# EAGLE board Load Bank Mosfet Control Board rev2 (EAGLE 8.4.1)
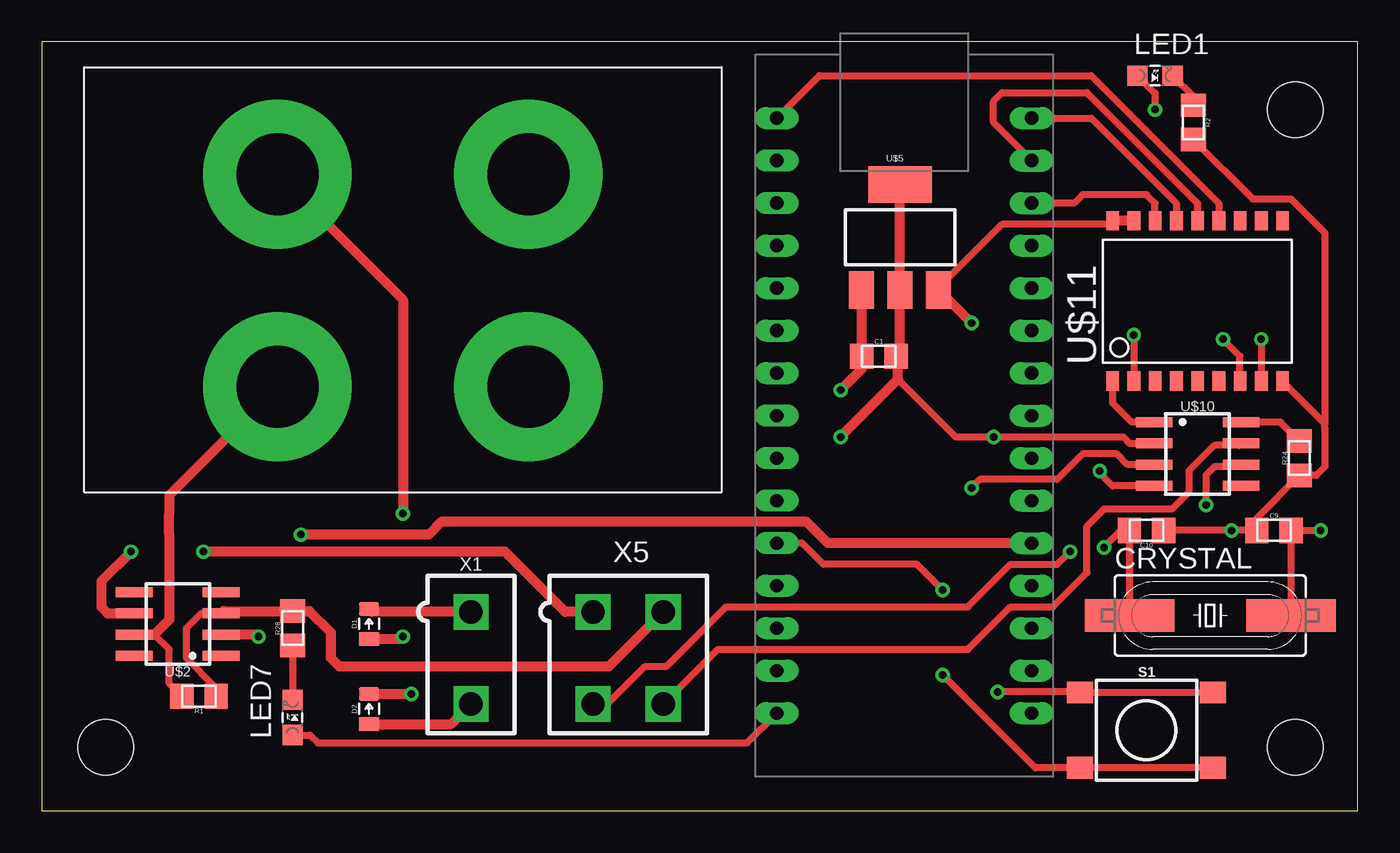
[diagram p0: board, top side]
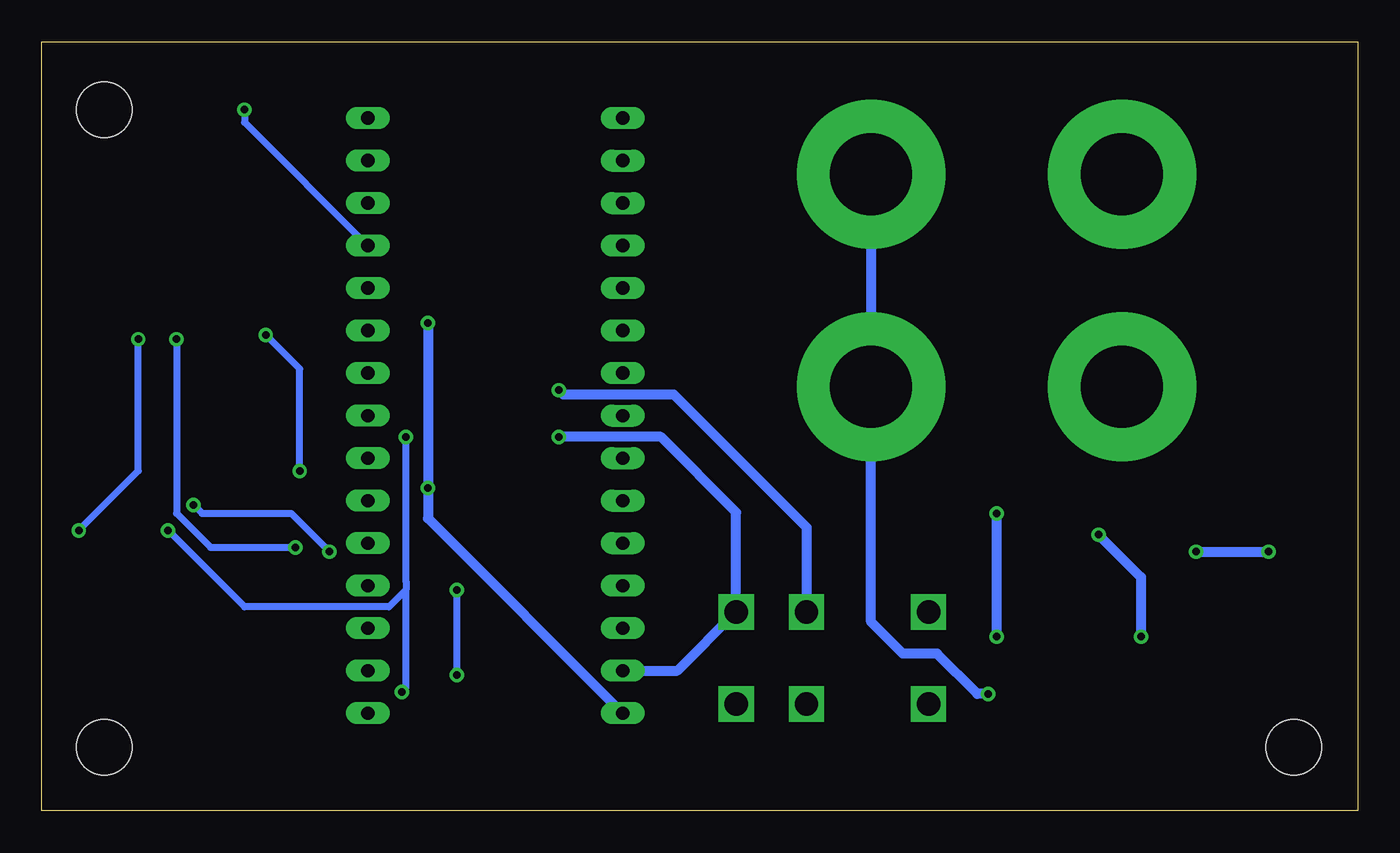
[diagram p1: board, bottom side, seen from below]

Size 78.66 x 45.96 mm. Coordinates in mm from the lower left corner, seen from the top.
Outline: 0,0 78.66,0 78.66,45.96 0,45.96 0,0
Copper layers (1*16): Top 0.035mm / dielectric 1.5mm / Bottom 0.035mm
Design rules "DRC Advanced Circuits": minimum track width 10mil, minimum drill 15mil, track to track 6mil, track to pad 6mil, pad to pad 6mil, via to via 6mil, smd to smd 6mil, copper to edge 40mil, drill to drill 6mil, minimum pad ring 10mil, minimum via ring 8mil, stop-mask expansion 4mil, vias tented up to drill 0mil, thermal gap 10mil
Holes 3.3 mm at 74.93,41.91 74.93,3.81 3.81,3.81

## Footprints (pad centres in the part's own frame; a part is rotated, then mirrored left to right if it is on the bottom)
0805 = smd 1.4 x 1.5: 1 -1.025,0; 2 1.025,0
HC49UP = smd 5.334 x 1.93: 1 -4.826,0; 2 4.826,0
0805_D = smd 0.8 x 1.2: A -0.9,0; C 0.9,0
LED-805 = smd 1.2 x 1.2: A 0,-1.05; C 0,1.05
TACTILE_SWITCH_SMD_6.2MM_TALL = smd 1.55 x 1.3: A1 -3.975,-2.25; A2 3.975,-2.25; B1 -3.975,2.25; B2 3.975,2.25
SOIC-08 = smd 0.6 x 2.2: 1 -1.905,-2.6; 2 -0.635,-2.6; 3 0.635,-2.6; 4 1.905,-2.6; 5 1.905,2.6; 6 0.635,2.6; 7 -0.635,2.6; 8 -1.905,2.6
SOT-227B = drill 4.9 pad 8.89: P$1 11.55,19; P$2 26.55,19; P$3 26.55,6.3; P$4 11.55,6.3
ARDUINO_NANO = drill 0.8 long: 3.3V 1.27,36.83; 5V 1.27,11.43; A0 1.27,31.75; A1 1.27,29.21; A2 1.27,26.67; A3 1.27,24.13; A4 1.27,21.59; A5 1.27,19.05; A6 1.27,16.51; A7 1.27,13.97; AREF 1.27,34.29; D0(RX) 16.51,6.35; D1(TX) 16.51,3.81; D2 16.51,13.97; D3 16.51,16.51; D4 16.51,19.05; D5 16.51,21.59; D6 16.51,24.13; D7 16.51,26.67; D8 16.51,29.21; D9 16.51,31.75; D10 16.51,34.29; D11 16.51,36.83; D12 16.51,39.37; D13 1.27,39.37; GND 1.27,6.35; GND1 16.51,11.43; RST 1.27,8.89; RST1 16.51,8.89; VIN 1.27,3.81
SOT223 = smd 1.5 x 2.235: 1 -2.3,-3.15; 2 0,-3.15; 3 2.3,-3.15 | smd 3.8 x 2.2: 4 0,3.15
SOIC-18W = smd 0.762 x 1.143: 1 -5.08,-4.788; 2 -3.81,-4.788; 3 -2.54,-4.788; 4 -1.27,-4.788; 5 0,-4.788; 6 1.27,-4.788; 7 2.54,-4.788; 8 3.81,-4.788; 9 5.08,-4.788; 10 5.08,4.788; 11 3.81,4.788; 12 2.54,4.788; 13 1.27,4.788; 14 0,4.788; 15 -1.27,4.788; 16 -2.54,4.788; 17 -3.81,4.788; 18 -5.08,4.788
MINIFIT_5566-2 = drill 1.4 square: 1 0,-2.75; 2 0,2.75
MINIFIT_5566-4 = drill 1.4 square: 1 2.1,-2.75; 2 -2.1,-2.75; 3 2.1,2.75; 4 -2.1,2.75

## Placement (x,y rotation side)
C1  .22uF  [0805]  50.04,27.18 0 top
C9  22pF  [0805]  73.66,16.76 0 top
C10  22pF  [0805]  66.04,16.76 180 top
CRYSTAL  16MHz  [HC49UP]  69.85,11.68 0 top
D1  DIODE0805  [0805_D]  19.56,11.18 90 top
D2  DIODE0805  [0805_D]  19.56,6.1 90 top
LED1  GREEN  [LED-805]  66.55,43.94 270 top
LED7  PURPLE  [LED-805]  14.99,5.59 0 top
R1  10k  [0805]  9.4,6.86 180 top
R2  200  [0805]  68.83,41.15 270 top
R24  4.7k  [0805]  75.18,21.08 90 top
R28  200  [0805]  14.99,10.92 90 top
S1  [TACTILE_SWITCH_SMD_6.2MM_TALL]  66.04,4.83 0 top
U$2  MC34152  [SOIC-08]  8.13,11.18 90 top
U$3  IXTN660N04T4  [SOT-227B]  2.54,19.05 0 top
U$4  ARDUINO_NANO  [ARDUINO_NANO]  42.67,2.03 0 top
U$5  [SOT223]  51.31,34.29 0 top
U$10  MCP2551  [SOIC-08]  69.09,21.34 270 top
U$11  MCP2515SMD  [SOIC-18W]  69.09,30.48 0 top
X1  CONNECTOR-2  [MINIFIT_5566-2]  25.65,9.14 180 top
X5  MINIFIT_5566-4  [MINIFIT_5566-4]  35.05,9.14 180 top

## Library data of the parts
C1 C9 C10 D1 D2 LED1 LED7 R1 R2 R24 R28 S1 U$2-U$5 U$10 U$11 = HyTechDevices
CRYSTAL = SparkFun-FreqCtrl
X1 = HyTechDevices; OC_FARNELL: 1822072; OC_NEWARK: unknown
X5 = HyTechDevices; OC_FARNELL: unknown; OC_NEWARK: unknown

## Nets
+5V: LED7.A U$4.VIN U$5.3 U$10.3 U$11.17 U$11.18
+12V: C1.1 U$2.6 U$5.1 X5.1
CANH: U$10.7 X5.4
CANL: U$10.6 X5.3
CS: U$4.D10 U$11.16
GND: C1.2 C9.1 C10.1 R1.1 R2.2 R24.1 R28.2 S1.B1 S1.B2 U$2.3 U$4.GND U$5.2 U$5.4 U$10.2 U$11.9 X5.2
INT: U$11.12
MISO: U$4.D12 U$11.15
MOSI: U$4.D11 U$11.14
N$1: D1.C X1.1
N$2: D1.A U$3.P$1
N$3: R1.2 U$2.7 U$3.P$4
N$4: U$2.2 U$4.D2
N$5: D2.C U$3.P$2 U$3.P$3
N$6: LED1.A U$4.D9
N$7: D2.A X1.2
N$8: LED1.C R2.1
N$9: S1.A1 S1.A2 U$4.A7
N$37: U$10.1 U$11.1
N$39: U$10.4 U$11.2
N$40: C9.2 CRYSTAL.2 U$11.8
N$41: R24.2 U$10.8
N$42: C10.2 CRYSTAL.1 U$11.7
N$61: LED7.C R28.1
SCK: U$4.D13 U$11.13

## Tracks (layer width: path | path; a pad name or v marks a point on that pad's centre or on a via)
+5V  (via drill 0.45)
  Top 0.406: LED7.A 16.04,4.54 16.51,4.06 42.16,4.06 U$4.VIN | U$11.18 63.79,35.05 57.4,35.05 53.61,31.26 U$5.3 | U$10.3 64.9,20.7 64.26,21.34 62.23,21.34 60.71,19.81 56.09,19.81 v55.58,19.3
  Top 0.61: U$5.3 v55.58,29.17 | U$11.17 U$11.18
  Bottom 0.61: v55.58,29.17 v55.58,19.3 55.58,17.48 U$4.VIN
+12V  (via drill 0.45)
  Top 0.61: X5.1 31.29,11.89 27.69,15.49 v9.65,15.49 | v5.33,15.49 3.56,13.72 3.56,12.19 3.94,11.81 U$2.6 | U$5.1 C1.1 49.01,26.41 v47.75,25.15
  Bottom 0.61: v9.65,15.49 v5.33,15.49 | v47.75,25.15 47.5,24.89 40.89,24.89 32.95,16.95 X5.1
CANH
  Top 0.406: X5.4 40.41,9.65 55.37,9.65 57.91,12.19 60.45,12.19 62.48,14.22 62.48,17.02 63.5,18.03 67.56,18.03 68.58,19.05 68.58,20.32 70.1,21.84 71.56,21.84 U$10.7
CANL  (via drill 0.45)
  Top 0.406: X5.3 33.83,6.39 36.07,8.64 37.34,8.64 40.89,12.19 55.37,12.19 57.91,14.73 60.71,14.73 v61.47,15.49 | U$10.6 71.56,20.57 70.1,20.57 69.6,20.07 v69.6,18.29
  Bottom 0.406: v69.6,18.29 69.09,17.78 63.75,17.78 v61.47,15.49
CS
  Top 0.406: U$11.16 66.55,36.32 66.04,36.83 62.23,36.83 61.72,36.32 U$4.D10
GND  (via drill 0.45)
  Top 0.406: U$2.3 9.53,11.81 8.64,10.92 8.64,9.14 10.35,7.43 10.35,6.88 R1.1 | C10.1 v71.12,16.76 C9.1 72.64,17.51 R24.1 76.19,20.06 76.71,20.57 76.71,22.86 76.71,23.15 | 51.19,25.79 54.62,22.35 v56.9,22.35 64.64,22.35 65.02,21.97 U$10.2 | U$11.9 76.71,23.15 | R2.2 72.38,36.58 74.68,36.58 76.71,34.54 76.71,23.15 | v57.15,7.11 62.03,7.11 S1.B1 S1.B2
  Top 0.61: U$2.3 10.86,11.95 R28.2 15.99,11.95 17.27,10.67 17.27,9.14 17.78,8.64 33.89,8.64 X5.2 | U$5.4 U$5.2 51.31,27.42 51.19,27.3 | 51.19,27.3 C1.2 | v47.75,22.35 51.19,25.79 51.19,27.3
  Bottom 0.406: v71.12,16.76 66.55,12.19 57.91,12.19 56.9,13.21 | 56.9,13.21 56.9,13.72 v56.9,22.35 | v57.15,7.11 56.9,7.37 56.9,13.21
  Bottom 0.61: v47.75,22.35 41.66,22.35 37.15,17.85 X5.2 40.66,8.38 U$4.GND
MISO
  Top 0.406: U$4.D12 62.74,41.4 67.82,36.32 U$11.15
MOSI
  Top 0.406: U$4.D11 56.9,41.15 56.9,42.42 57.4,42.93 62.48,42.93 69.09,36.32 U$11.14
N$1
  Top 0.61: X1.1 19.74,11.89 D1.C
N$2  (via drill 0.45)
  Top 0.61: v21.59,17.78 21.59,30.55 U$3.P$1 | v21.59,10.41 21.45,10.28 D1.A
  Bottom 0.61: v21.59,17.78 v21.59,10.41
N$3
  Top 0.406: 6.73,10.54 7.62,9.65 7.62,7.61 R1.2
  Top 0.61: U$2.7 6.73,10.54 7.62,11.43 7.62,16.51 7.62,17.78 7.62,18.88 U$3.P$4
N$4  (via drill 0.45)
  Top 0.61: U$4.D2 46.99,16 45.72,17.27 23.88,17.27 23.11,16.51 v15.49,16.51 | v12.95,10.41 12.83,10.54 U$2.2
  Bottom 0.61: v15.49,16.51 12.95,13.97 v12.95,10.41
N$5  (via drill 0.45)
  Top 0.61: D2.C v22.1,7
  Bottom 0.61: v22.1,7 22.74,7 25.15,9.4 27.19,9.4 29.09,11.3 U$3.P$3 U$3.P$2
N$6  (via drill 0.45)
  Top 0.406: LED1.A 66.55,42.89 v66.55,41.91
  Bottom 0.406: v66.55,41.91 66.55,41.15 U$4.D9
N$7
  Top 0.61: D2.A 24.46,5.2 X1.2
N$8
  Top 0.406: LED1.C 68.83,42.71 R2.1
N$9  (via drill 0.45)
  Top 0.406: v53.85,8.13 59.4,2.58 S1.A1 S1.A2 | v53.85,13.21 52.32,14.73 46.74,14.73 45.47,16 U$4.A7
  Bottom 0.406: v53.85,8.13 v53.85,13.21
N$37
  Top 0.406: U$11.1 64.01,24.38 65.15,23.24 U$10.1
N$39  (via drill 0.45)
  Top 0.406: U$10.4 64.01,19.43 63.25,20.19 v63.25,20.32 | v65.28,28.45 U$11.2
  Bottom 0.406: v63.25,20.32 63.25,26.42 v65.28,28.45
N$40  (via drill 0.45)
  Top 0.406: CRYSTAL.2 74.68,16.75 C9.2 v76.45,16.76 | v72.9,28.19 U$11.8
  Bottom 0.406: v76.45,16.76 72.9,20.32 v72.9,28.19
N$41
  Top 0.406: R24.2 74.05,23.24 U$10.8
N$42  (via drill 0.45)
  Top 0.406: CRYSTAL.1 C10.2 64.52,16.76 v63.5,15.75 | U$11.7 71.63,27.18 v70.61,28.19
  Bottom 0.406: v70.61,28.19 70.61,17.78 68.58,15.75 v63.5,15.75
N$61
  Top 0.406: R28.1 LED7.C
SCK
  Top 0.406: U$4.D13 46.48,43.94 62.74,43.94 70.36,36.32 U$11.13

## Text on the board
tDocu: Designed by Sai and Nathan | HyTech 2018 Load Bank Mosfet Driver Board rev2